# Altium PCB СФ МЭИ ЛБ ПЭ2-18 11.03.04 03.PcbDoc
Units mm, origin at the board's own origin, x right, y up, seen from the top; angles counter-clockwise.
Board outline 36.78 x 15.7 mm, 2 copper layers (Top Layer, Bottom Layer); 15 components, 9 nets, 46 pads, 0 vias.
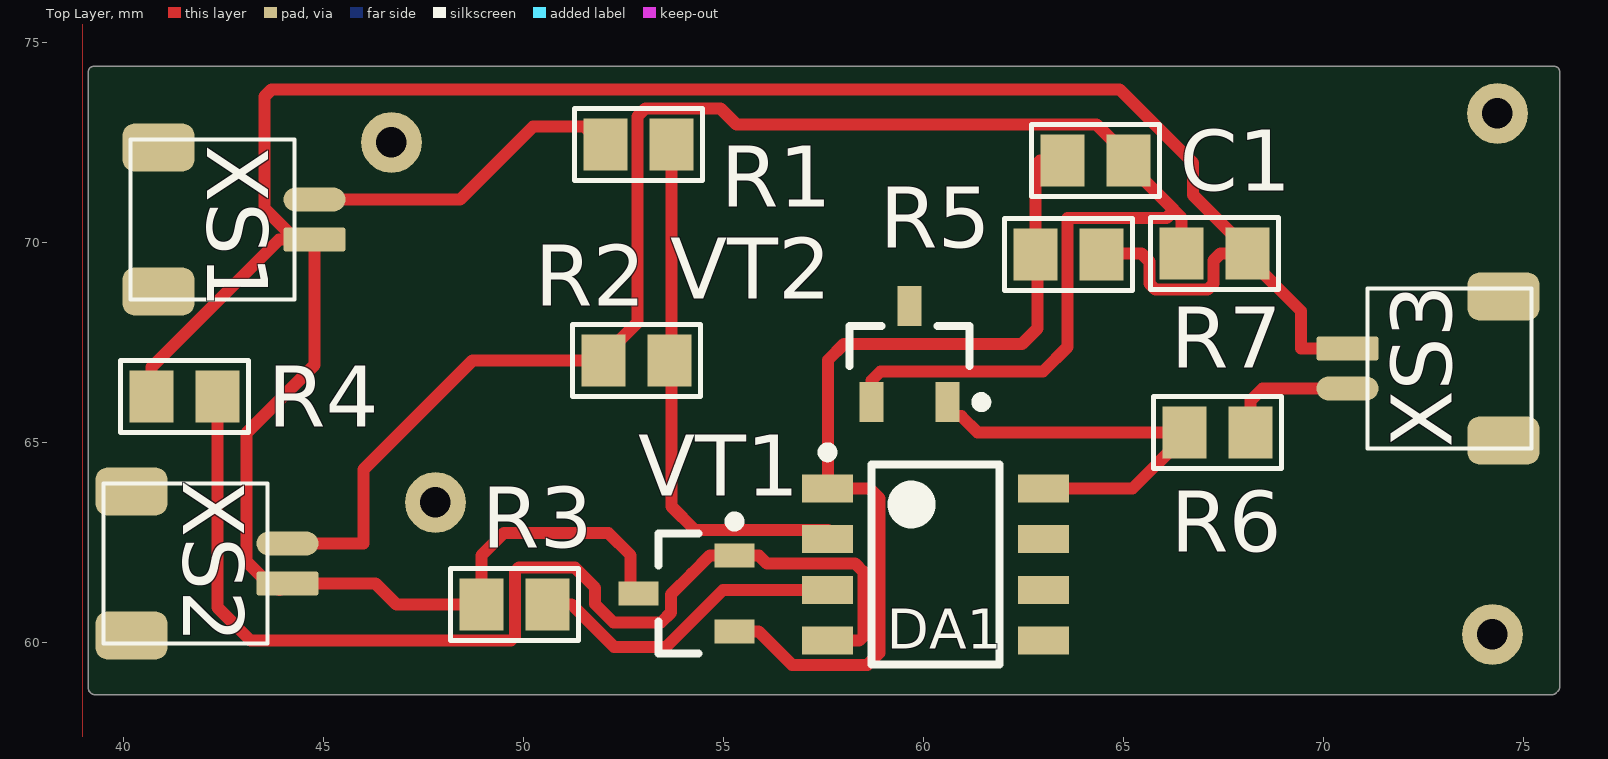
[diagram p0: Top Layer view]
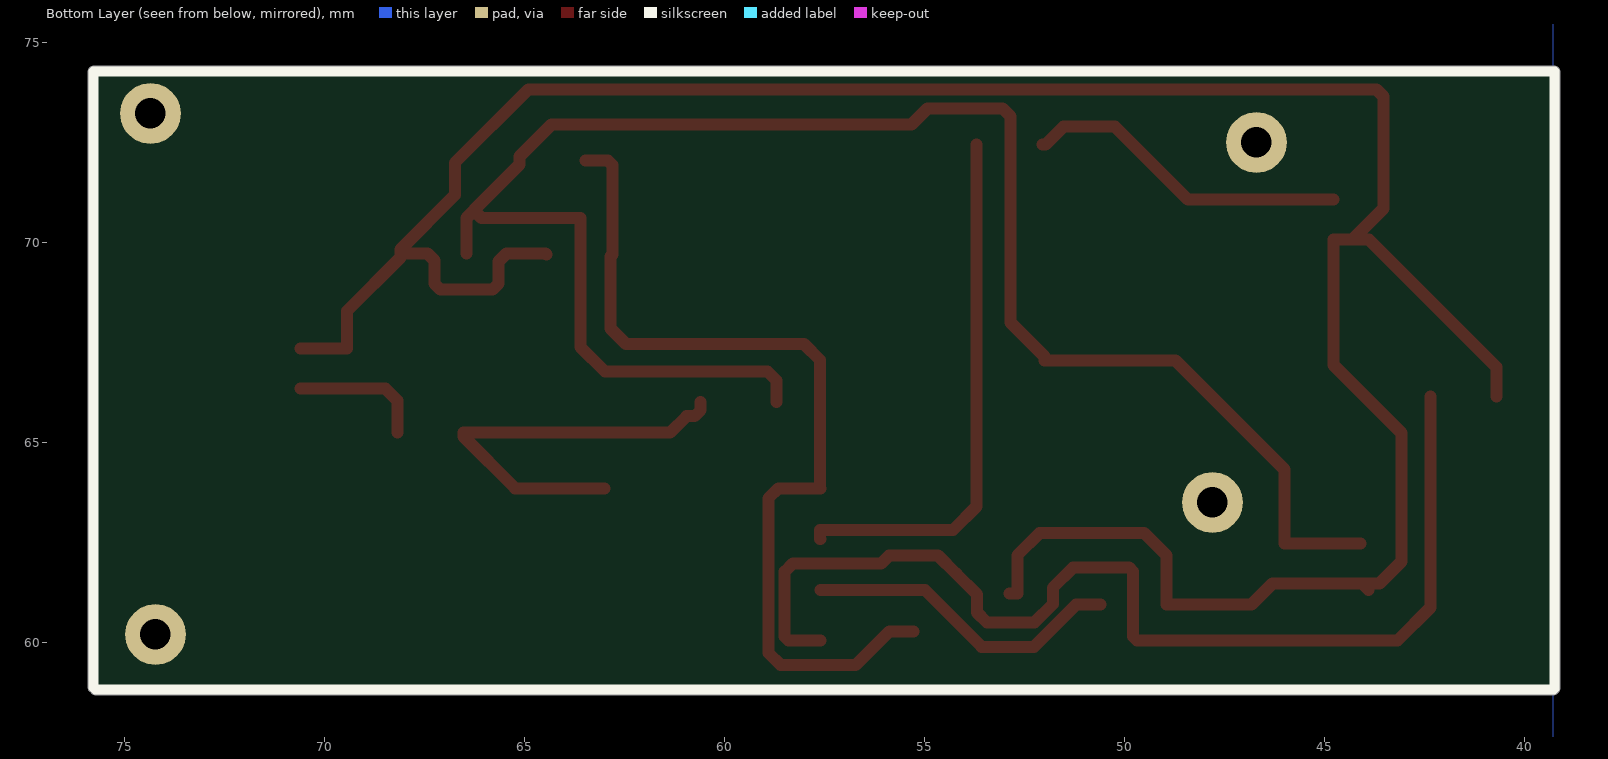
[diagram p1: Bottom Layer view, seen from below]
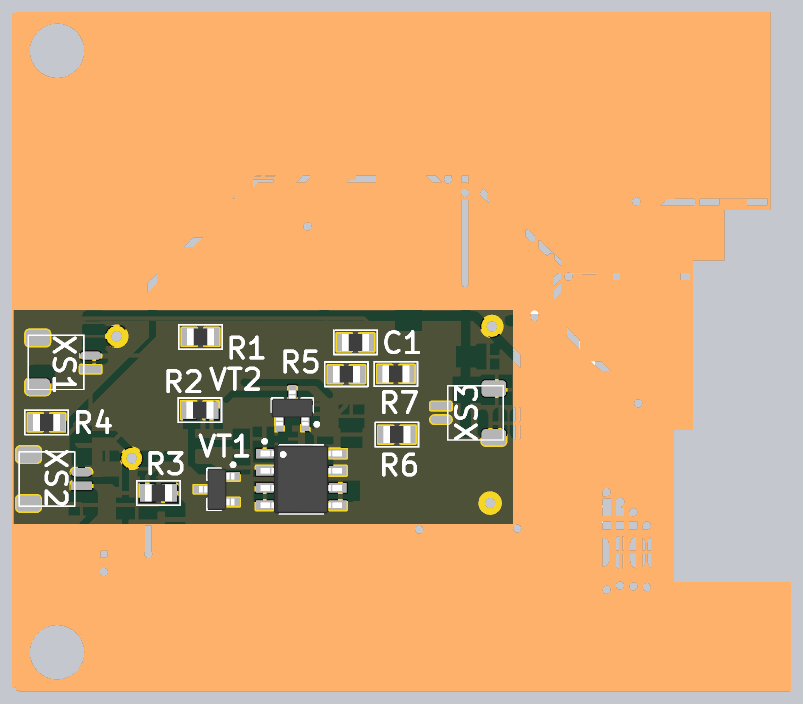
[diagram p2: 3D render of the assembled board from above, using the file's embedded part models]

## Layer stack, top to bottom
Top Solder: solder mask 0.0102, Solder Resist, Dk 3.5
Top Layer: signal copper 0.0356
Dielectric 1: dielectric 0.32, FR-4, Dk 4.8
Bottom Layer: signal copper 0.0356
Bottom Solder: solder mask 0.0102, Solder Resist, Dk 3.5

## Board outline
39.16,58.759 cw(c39.25,58.85) 39.123,58.85 39.123,74.275 cw(c39.25,74.275) 39.25,74.402 75.775,74.402 cw(c75.775,74.275) 75.902,74.275 75.902,58.875 cw(c75.775,58.875) 75.865,58.785 75.815,58.735 cw(c75.725,58.825) 75.725,58.698 39.275,58.698 cw(c39.275,58.825) 39.184,58.735 39.185,58.735

## Design rules (kind name [scope] priority, off if disabled: settings)
Clearance [All] p1: gap=0.1 ignorepadtopadclearanceinfootprint=FALSE except(0: Arc-Hole Track-Hole SMDPad-Hole THPad-Hole Via-Hole Fill-Hole Poly-Hole Region-Hole Text-Hole)
MinimumAnnularRing MinimumAnnularRing_1 [All] p1: minimumring=0.254
MinimumAnnularRing [All] p2: minimumring=0.254
PolygonConnect [All] p1: connectstyle=Relief reliefconductorwidth=0.254 reliefentries=4 polygonreliefangle="90 Angle" airgapwidth=0.254
RoutingVias [All] p1: holewidth=0.1 width=1.27 viastyle="Through Hole" minholewidth=0.2 minwidth=0.4 maxholewidth=0.2 maxwidth=0.4
SolderMaskExpansion [All] p1: expansion=0.102 istentingtop=FALSE
Width [All] p1: maxlimit=1 minlimit=0.1 preferedwidth=0.3
30 further rules are at their usual default settings.

## Classes and differential pairs
component class "СФ МЭИ ЛБ ПЭ2-18 11.03.04 02 Э3": C1 DA1 R1 R2 R3 R4 R5 R6 R7 VT1 VT2 XS1 XS2 XS3

## Components (designator, comment, footprint, x,y, rotation, side; value= is the part's Value field where it differs from the comment)
C1 "0.1u" 0805 64.3,72.05 r0 top
DA1 "OPA2337EA/3K" SOIC-8 60.3,61.95 r0 top
R1 "10k" 0805 52.875,72.45 r0 top
R2 "100к" 0805 52.825,67.05 r180 top
R3 "10k" 0805 49.775,60.95 r0 top
R4 "10k" 0805 41.525,66.15 r180 top
R5 "5.1" 0805 63.625,69.7 r0 top
R6 "10k" 0805 67.35,65.249 r0 top
R7 "1k" 0805 67.275,69.725 r180 top
VT1 "Биполярный транзистор n-p-n" SOT23 54.075,61.225 r180 top
VT2 "Биполярный транзистор p-n-p" SOT23 59.646,67.209 r90 top
XS1 "SM02B" "CI1102M1H  (F)" 42.575,72.575 r270 top
XS2 "SM02B" "CI1102M1H  (F)" 41.9,63.975 r270 top
XS3 "SM02B" "CI1102M1H  (F)" 72.8,64.85 r90 top
ZBOAS240494150 "Comment" "BOASVIEWassembly:Вид спереди для сборочного:4:1:0:101" 61.075,2391.425 r0 top

## Footprints (in the part's own frame and the unit in brackets; to place one, negate y for a bottom-side part, rotate by r counter-clockwise, add the part's x,y. Pads: shape width x height; smd on the part's side, far side on the other; paste and mask are expansions set on the pad)
0805 [mm] "Чип (SMD)"
  rect 1.1x1.3 smd: 1(-0.825,0) 2(0.825,0)
  silkscreen extent -1.6,-0.9 1.6,0.9, body extent -1,-0.63 1,0.63, height 0.5
"BOASVIEWassembly:Вид спереди для сборочного:4:1:0:101" [mm]
"CI1102M1H  (F)" [mm]
  oval 0.6x1.55 smd: 1(1.5,2.2)
  rrect20% 0.6x1.55 smd: 2(2.5,2.2)
  rrect50% 1.2x1.8 smd: 3(0.2,-1.7) 4(3.8,-1.7)
  silkscreen extent 0,-2.4 4,1.7
SOIC-8 [mm] "SOIC, 8-Leads, Body 4,90x3,90mm, Pitch 1,27mm, IPC Medium Density"
  rect 1.28x0.7 smd: 1(-2.7,1.905) 2(-2.7,0.635) 3(-2.7,-0.635) 4(-2.7,-1.905) 5(2.7,-1.905) 6(2.7,-0.635) 7(2.7,0.635) 8(2.7,1.905)
  silkscreen extent -2.82,-2.5 1.6,2.93, body extent -3,-2.5 3,2.5, height 1.75
SOT23 [mm] "SOT23, 3-Leads, Body 2,92x2,45mm, Pitch 0,95mm, IPC Medium Density"
  rect 1x0.6 smd: 1(-1.2,-0.95) 2(-1.2,0.95) 3(1.2,0)
  silkscreen extent -1.33,-1.92 0.7,1.5, body extent -1.3,-1.52 1.3,1.52, height 1.12

## Part data
C1: library part "К53-68\"R\"-25В-0.1 мкФ ±10% 0805_1", "К53-68\"R\"-25В-0.1 мкФ ±10%"
R1 R3 R4 R6: library part "0.125Вт 0805 10 кОм, 5%, Чип резистор (SMD)", "0805-0.125 Вт -10 кОм±5%"
R2: library part "0.125Вт 0805 100к кОм, 5%, Чип резистор (SMD)_1", "0805-0.125 Вт -100 кОм±5%"
R5: library part "0.125Вт 0805 5.1 кОм, 5%, Чип резистор (SMD)", "0805-0.125 Вт -5.1 кОм±5%"
R7: library part "0.125Вт 0805 1 кОм, 5%, Чип резистор (SMD)", "0805-0.125 Вт -1 кОм±5%"
VT1: library part 2N697, "2N697"
VT2: library part 2N2338, "2N2338"

## Free pads (board coordinates)
  round 1.524 hole 0.762: 2(74.225,60.2) 3(74.35,73.225) 4(46.7,72.5) 5(47.8,63.5)

## Nets (pads, with @x,y where several pads share a name; then routed paths per layer and width w, separated by ;. In a path a pad name is that pad's centre, name@x,y a point inside that pad or via, vN(x,y) a via of type N, cw(c..) or ccw(c..) an arc to the next point about the centre after c; other vN are vias at no path point)
NetC1_1: C1.1 DA1.1 R5.1 VT1.2 | length 23
  Top Layer w0.3: VT1.2 55.88,60.275 56.719,59.436 58.598,59.436 58.903,59.741 58.903,63.602 58.649,63.855 DA1.1@57.607,63.855 ; DA1.1 DA1.1@57.607,63.855 ; C1.1 62.917,72.05 62.8,71.933 R5.1 62.85,69.65 62.85,67.85 62.462,67.462 58.014,67.462 57.607,67.056 DA1.1@57.607,63.855
NetC1_2: C1.2 R2.2 R7.2 VT2.2 XS2.1 | length 44.9
  Top Layer w0.3: XS2.1 45.999,62.475 45.999,64.324 48.725,67.05 R2.2 52,67.15 52.85,68 52.85,73.154 53.046,73.35 54.925,73.35 55.325,72.95 64.325,72.95 65.125,72.15 C1.2 65.125,71.95 66.262,70.813 66.262,70.8 ; VT2.2 58.696,66.544 58.928,66.777 62.992,66.777 63.602,67.386 63.602,70.612 66.074,70.612 66.262,70.8 ; R7.2 66.45,70.612 66.262,70.8
NetDA1_2: DA1.2 R1.2 R2.1 | length 13.4
  Top Layer w0.3: R1.2 53.7,70.575 53.7,63.398 54.284,62.814 57.607,62.814 57.607,62.585 DA1.2
NetDA1_3: DA1.3 R3.2 | length 8
  Top Layer w0.3: R3.2 51.206,60.95 52.263,59.893 53.569,59.893 54.99,61.315 DA1.3
NetDA1_4: DA1.4 R4.1 VT1.1 | length 28
  Top Layer w0.3: R4.1 42.35,60.876 43.18,60.046 49.682,60.046 49.784,60.147 49.784,61.773 49.886,61.874 51.283,61.874 51.791,61.366 51.791,60.96 52.248,60.502 53.442,60.502 53.688,60.749 53.688,61.202 54.206,61.72 54.661,62.175 54.834,62.175 VT1.1 55.884,62.175 56.083,61.976 58.293,61.976 58.496,61.773 58.496,60.147 58.394,60.045 DA1.4
NetDA1_8: DA1.8 R6.1 VT2.1 | length 10.5
  Top Layer w0.3: VT2.1 60.596,65.809 60.746,65.659 60.946,65.659 61.356,65.249 R6.1 66.525,65.149 65.231,63.855 DA1.8
NetR1_1: R1.1 XS1.1 | length 8.2
  Top Layer w0.3: XS1.1 46.596,71.075 48.418,71.075 49.793,72.45 50.241,72.898 51.52,72.898 51.968,72.45 R1.1
NetR3_1: R3.1 R4.2 R5.2 R7.1 VT1.3 XS1.2 XS2.2 XS3.2 | length 67.9
  Top Layer w0.3: R4.2 40.7,66.884 43.891,70.075 XS1.2@44.3,70.075 ; XS2.2@43.9,61.316 44.059,61.475 43.625,61.475 43.075,62.025 43.075,65.236 44.775,66.936 XS1.2 XS1.2@44.3,70.075 ; XS2.2 46.3,61.475 46.825,60.95 R3.1 48.95,62.179 49.509,62.738 52.121,62.738 52.68,62.179 52.68,61.225 VT1.3 ; R5.2 64.475,69.725 65.45,69.725 65.65,69.525 65.65,68.971 65.796,68.825 67.104,68.825 67.25,68.971 67.25,69.549 67.426,69.725 R7.1 ; XS3.2 69.442,67.35 69.442,68.283 68.1,69.625 R7.1 ; XS1.2@44.3,70.075 43.525,70.85 43.525,73.649 43.701,73.825 64.904,73.825 66.739,71.989 66.739,71.186 68.1,69.825 R7.1
NetR6_2: R6.2 XS3.1 | length 3.3
  Top Layer w0.3: R6.2 68.175,66.047 68.478,66.35 XS3.1
pads on no net: DA1.5 DA1.6 DA1.7 VT2.3 XS1.3 XS1.4 XS2.3 XS2.4 XS3.3 XS3.4

## Polygon pours and split planes (outlines as drawn)
no net on Bottom Layer "GND A" (solid, shelved, pour order 7): 39.275,46.375 39.275,96.4 142.075,96.4 142.075,46.375
no net on Top Layer "GND A" (solid, shelved, pour order 6): 38.981,46.316 38.981,96.341 141.781,96.341 141.781,46.316
no net on Top Overlay "NONET_L01_P-001" (solid): 39.325,73.95

## Silkscreen, mask and mechanical layers (free items; w line width, h text height)
Bottom Overlay:
  lines w0.254: 39.25,58.85 39.275,58.825 ; 39.25,58.85 39.25,74.275 75.775,74.275 75.775,58.875 75.725,58.825 39.275,58.825 ; 39.25,58.85 39.275,58.825
Mechanical 7:
  text "BOASFORMAT|А3|101|0|883070867|165354330|1000000000|4:1|" at 0,2540 h0
  text "DimPos|62677165|962726378|-6574804|-15009842|3|1537097" at 175.9,2483.45 h0
  text "DimPos|75482283|960088583|-24970473|-17372047|1|908151" at 255.15,2482.75 h0
  text "DimPos|68858268|959045276|-15531496|-17903543|4|1178539" at 214.35,2481.45 h0
  text "DimPos|55206693|955108268|-8051181|-21358267|1|908151" at 160.675,2480.225 h0
  text "DimPos|44763780|963454724|-11181102|-12381890|5|1742827" at 142.1,2478.625 h0
  text "DimPos|26850394|959980315|10098425|-13572835|2|1772217" at 42.55,2472.825 h0
  text "DimPos|45305118|953897638|12706693|-18897638|6|1454805" at 82.8,2470.9 h0
  text "DimPos|26417323|953356299|11407480|-10206693|3|1537097" at 38.125,2447.45 h0
  text "DimPos|25984252|945649606|11515748|-5216536|4|1178539" at 36.75,2415.2 h0
  text "DimPos|79124016|954173228|-12509842|6978346|1|908151" at 232.75,2405.875 h0
  text "DimPos|39980315|945000000|9547244|10423228|7|1416598" at 77.3,2373.825 h0
  text "DimPos|63198819|958651575|-4350394|25669292|1|908151" at 171.575,2369.775 h0
  text "DimPos|69389764|951279528|-9340551|18562993|2|1772217" at 199.975,2369.1 h0
  text "DimPos|49320866|944458661|9448819|12381889|8|1584121" at 101.275,2367.475 h0
  text "DimPos|58877953|945757874|8366142|13789370|9|1454805" at 128.3,2367.2 h0
  text "SET2|Superlayer=MechanicalLayer7|Wsuperlayer=MechanicalLayer8|Layergrid=MechanicalLayer9|Werase=MechanicalLayer11|Layermark=MechanicalLayer12|Layerstamp=MechanicalLayer13|Thinline=0,18|Basicline=0,6|Gridline=0,18|Boardline=0,6|Contourpolygonline=0,6|PcbGridStep=1,25|PcbGridCleareanceAtView=0|PcbGridNumberEach=l4|PcbGridLineEach=l2|PcbGridCountSecondaryStrip=1|PcbGridEnabledStrip=True|PcbSignalGridEnabled=True|PcbSignalShowBukva=True|RealSignalLayerNames=False|PcbGridEnabledBothSide=False|RealLayerNames=False|SilkShowPad=True|SilkViewName=Слой маркировки|SilkShowHole=True|SilkShowAxis=True|SilkShowBukva=True|SilkShowGrid=False|SolderShowGrid=False|SolderViewName=Слой маски|SolderShowAxis=False|SolderShowBukva=False|MainViewShowGrid=False|MainViewUseShapesDrill=False|ShowBukvaOnSboky=True|Density=2,2|TableName=Таблица 1|RazrezWidth=100|Sher=Rz 160|Asstoplayer=TopOverlay|Asstoplayer2=MechanicalLayer15|Assbottomlayer=MechanicalLayer2|Assbottomlayer2=MechanicalLayer15|AssMinDiameterHoles=2|AssDim=False|AssMech=True|AssSilk=False|AssComponentSilk=False|AssFreeSilk=False|AssSmdPads=False|AssGridEnable=False|Mirror=Horisontal|PcbGridFontSize=5|PcbGridCenterZero=False|TTStampDistance=12|MainFontSize=5|PolyStep=2|PcbDrillDrawingGridEnabled=False|PcbDrillDrawingViewName=Слой сверловки|PcbDrillDrawingShowBukva=False|PcbDrillDrawingShowAxis=False|PcbSignalLayersUseDrill=False|PcbSignalLayersUseShapesDrill=False|PcbSignalLayersShowAxis=False" at 0,0.025 h0
  text "2TT0008# 9.Радиатор прикрепить при помощи клей теплопроводный Радиал" at 0,0 h0
  text "2TT0007#  8 Клеймить." at 0,0 h0
  text "2TT0006#  7 Маркировать обозначение и заводской номер печатного узла черной краской МКЭ ОСТ 4ГО.054.2050М2 шрифтом 3,5 или 5 тип А ГОСТ 2.304-81, вместе, удобном для чтения." at 0,0 h0
  text "2TT0005#  6 Покрытие лак УР-231 ТУ6-21-14-90(3). Допускается покрытие лаком ЭП-730 ГОСТ 20824-81(3)." at 0,0 h0
  text "2TT0004#  5 Элементы поверхностного монтажа паять припойной пастой ПОС-61 ЛОК ТУ 400 К''Р''-1805-22-91, флюс ФПС-3 ТУ400 СП \"ЭВ\"-2178-137-98." at 0,0 h0
  text "2TT0003#  4 Меры защиты от статического электричества по ОСТ 92-1615-74. Степень жесткости II по ОСТ11.073.062-2001." at 0,0 h0
  text "2TT0002#  3** Размеры обеспеч. инстр." at 0,0 h0
  text "2TT0001#  2* Размеры для справок." at 0,0 h0
  text "2TT0000#  1 Установку элементов производить по чертежу." at 0,0 h0
  text "TT0005#" at 0,0 h0
  text "TT0004#  5 Конфигурацию печатных проводников выдерживать по координатной сетке с отклонениями от чертежа ±1,5 мм." at 0,0 h0
  text "TT0003#  4 Шаг координатной сетки 1,25 мм. Линии сетки нанесены через одну." at 0,0 h0
  text "TT0002#  3 Печатная плата должна соответствовать ГОСТ Р 53429-2009, группе жесткости 3 при верхнем значении температуры окружающей среды (85±2) °С." at 0,0 h0
  text "TT0001#  2 Класс точности 3 по ГОСТ Р 53429-2009." at 0,0 h0
  text "TT0000#  1 *  Размер для справок." at 0,0 h0
  text "STAMP|Наименование1|Промежуточный" at 0,0 h0
  text "STAMP|Наименование2|Усилитель" at 0,0 h0
  text "STAMP|Обозначение|СФ МЭИ ЛБ ПЭ2-18 11.03.04 02" at 0,0 h0
  text "STAMP|Масса|120 г" at 0,0 h0
  text "STAMP|Разработал|Гончаренко А.Ю." at 0,0 h0
  text "STAMP|Проверил|Смолин В.А." at 0,0 h0
  text "STAMP|Утвердил|Рассказа Д.С." at 0,0 h0
  text "STAMP|Var|Нач. отд." at 0,0 h0
  text "STAMP|Tech|Т.контр." at 0,0 h0
  text "STAMP|Normo|Н.контр." at 0,0 h0
  text "STAMP|Check|Пров." at 0,0 h0
  text "STAMP|Design|Разраб." at 0,0 h0
  text "STAMP|Utv|Утв." at 0,0 h0
  text "STAMP|Первичная применяемость|СФ МЭИ ЛБ ПЭ2-18 11.03.04 02" at 0,0 h0
  text "STAMP|Организация|НИУ СФ МЭИ ПЭ2-18" at 0,0 h0
  text "2STAMP|Организация|НИУ СФ МЭИ ПЭ2-18" at 0,0 h0
  text "2STAMP|Масса|120 г" at 0,0 h0
  text "2STAMP|Первичная применяемость|СФ МЭИ ЛБ ПЭ2-18 11.03.04 02" at 0,0 h0
  text "2STAMP|Наименование1|Промежуточный" at 0,0 h0
  text "2STAMP|ТипДокумента|Сборочный чертёж" at 0,0 h0
  text "2STAMP|Наименование2|усилитель" at 0,0 h0
  text "2STAMP|Разработал|Гончаренко А.Ю." at 0,0 h0
  text "2STAMP|Проверил|Смолин В.А." at 0,0 h0
  text "2STAMP|Утвердил|Рассказа Д.С." at 0,0 h0
  text "2STAMP|Var|Нач. отд." at 0,0 h0
  text "2STAMP|Tech|Т.контр." at 0,0 h0
  text "2STAMP|Normo|Н.контр." at 0,0 h0
  text "2STAMP|Check|Пров." at 0,0 h0
  text "2STAMP|Design|Разраб." at 0,0 h0
  text "2STAMP|Utv|Утв." at 0,0 h0
  text "2STAMP|Обозначение|СФ МЭИ ЛБ ПЭ2-18 11.03.04 02 СБ" at 0,0 h0
  text "BOASVIADRILLTABLE:" at 0,0 h0
  text "2BOASDRILLTABLE:none,300000,Да,4,True," at 0,0 h0
Mechanical 9:
  circle w0.6: c140.225,2425.975 r0.2
  circle w0.6: c160.525,2434.975 r0.2
  circle w0.6: c174.9,2435.975 r0.2
  circle w0.6: c159.2,2445.325 r0.2
  circle w0.6: c176.25,2416.25 r0.2
  circle w0.6: c200.975,2423.6 r0.2
  circle w0.6: c149.55,2402.225 r0.2
  circle w0.6: c125.275,2398.925 r0.2
  circle w0.6: c101.55,2400.3 r0.2
  circle w0.6: c115.075,2422.9 r0.2
  circle w0.6: c113.7,2447.175 r0.2
  circle w0.6: c66,2401.95 r0.2
  circle w0.6: c67.1,2421.525 r0.2
  circle w0.6: c68.2,2438.35 r0.2
  circle w0.6: c191.725,2438.625 r0.2
  lines w0.18: 28.757,2415.2 36.75,2415.2 66,2401.95 ; 29.221,2447.45 38.125,2447.45 67.1,2421.525 ; 33.049,2472.825 42.55,2472.825 68.2,2438.35 ; 68.702,2373.825 77.3,2373.825 101.55,2400.3 ; 74.105,2470.9 82.8,2470.9 115.075,2422.9 ; 92.251,2367.475 101.275,2367.475 125.275,2398.925 ; 113.7,2447.175 142.1,2478.625 151.527,2478.625 ; 119.605,2367.2 128.3,2367.2 149.55,2402.225 ; 140.225,2425.975 160.675,2480.225 167.982,2480.225 ; 159.2,2445.325 175.9,2483.45 184.804,2483.45 ; 160.525,2434.975 171.575,2369.775 178.882,2369.775 ; 174.9,2435.975 214.35,2481.45 222.343,2481.45 ; 176.25,2416.25 199.975,2369.1 209.476,2369.1 ; 191.725,2438.625 255.15,2482.75 262.457,2482.75 ; 200.975,2423.6 232.75,2405.875 240.057,2405.875
  text "3" at 178.4,2485.98 h10.75
  text "1" at 257.65,2485.28 h10.75
  text "4" at 216.85,2483.98 h10.75
  text "9" at 163.175,2482.755 h10.75
  text "7" at 144.6,2481.155 h10.75
  text "2" at 35.549,2475.355 h10.75
  text "8" at 76.605,2473.43 h10.75
  text "7" at 31.721,2449.98 h10.75
  text "2" at 31.257,2417.73 h10.75
  text "2" at 235.25,2408.405 h10.75
  text "7" at 71.202,2376.355 h10.75
  text "6" at 174.075,2372.305 h10.75
  text "7" at 202.475,2371.63 h10.75
  text "10" at 94.751,2370.005 h10.75
  text "4" at 122.105,2369.73 h10.75
Mechanical 13:
  lines w0.18: 230,2253 295,2253 ; 230,2258 295,2258 ; 230,2263 295,2263 ; 230,2268 295,2268 ; 230,2273 295,2273 ; 230,2288 295,2288 ; 230,2293 295,2293 ; 230,2298 295,2298 ; 369.96,2268 369.96,2283 ; 374.98,2268 374.98,2283
  lines w0.6: 8,2273 20,2273 ; 8,2308 20,2308 ; 8,2333 20,2333 ; 8,2358 20,2358 ; 8,2475 20,2475 ; 13,2248 13,2393 ; 13,2415 13,2535 ; 20,2393 8,2393 8,2248 20,2248 ; 20,2415 8,2415 8,2535 20,2535 ; 20,2521 90,2521 90,2535 ; 230,2248 230,2303 415,2303 ; 230,2278 295,2278 ; 230,2283 295,2283 ; 237,2278 237,2303 ; 247,2248 247,2303 ; 270,2248 270,2303 ; 285,2248 285,2303 ; 295,2248 295,2303 415,2303 ; 295,2263 365,2263 415,2263 ; 295,2288 415,2288 ; 365,2248 365,2288 ; 365,2268 415,2268 ; 365,2283 380,2283 415,2283 ; 380,2268 380,2288 ; 385.57,2263 385.57,2268 ; 397,2268 397,2288 ; 415,2311 415,2303 ; 20,2248 415,2248 415,2535 20,2535 ; 20,2248 20,2535
  text "СФ МЭИ ЛБ ПЭ2-18 11.03.04 02 СБ" at 89.51,2530.01 h7.32 r180
  text "Перв. примен." at 11.976,2494.373 h5.38 r90
  text "СФ МЭИ ЛБ ПЭ2-18 11.03.04 02" at 17.976,2482.064 h5.38 r90
  text "Справ. №" at 11.976,2437.78 h5.38 r90
  text "Подп. и дата" at 11.976,2365.961 h5.38 r90
  text "Инв. № дубл." at 11.976,2336.457 h5.38 r90
  text "1 Установку элементов производить по чертежу. /   2* Размеры для справок. /   3** Размеры обеспеч. инстр. /   4 Меры защиты от статического электричества по ОСТ 92-1615-74. Степень жесткости II по ОСТ11.073.062-2001. /   5 Элементы поверхностного монтажа паять припойной пастой ПОС-61 ЛОК ТУ 400 К''Р''-1805-22-91, флюс ФПС-3 ТУ400 СП \"ЭВ\"-2178-137-98.  /   6 Покрытие лак УР-231 ТУ6-21-14-90(3). Допускается покрытие лаком ЭП-730 ГОСТ 20824-81(3)." at 235,2323 h7.68
  text "Взам. инв. №" at 11.976,2311.496 h5.38 r90
  text "СФ МЭИ ЛБ ПЭ2-18 11.03.04 02 СБ" at 318.799,2293.391 h7.68
  text "Лит." at 369.328,2284.024 h5.38
  text "Масса" at 384.108,2284.024 h5.38
  text "Масштаб" at 399.133,2284.024 h5.38
  text "Подп. и дата" at 11.976,2282.461 h5.38 r90
  text "Промежуточный" at 312.95,2280.891 h7.68
  text "Изм." at 230.687,2279.024 h5.38
  text "Лист" at 238.024,2279.024 h5.38
  text "№ докум." at 252.271,2279.024 h5.38
  text "Подп." at 273.92,2279.024 h5.38
  text "Дата" at 285.963,2279.024 h5.38
  text "Разраб." at 230.533,2273.771 h5.38
  text "Гончаренко А.Ю." at 247.68,2273.771 h5.09
  text "120 г" at 383.233,2273.391 h7.68
  text "4:1" at 403.065,2273.391 h7.68
  text "усилитель" at 318.641,2272.891 h7.68
  text "Пров." at 230.533,2268.771 h5.38
  text "Смолин В.А." at 247.68,2268.771 h5.38
  text "Сборочный чертёж" at 316.094,2265.524 h5.38
  text "Т.контр." at 230.533,2263.771 h5.38
  text "Лист" at 366.442,2263.771 h5.38
  text "Листов" at 387.485,2263.771 h5.38
  text "1" at 407.424,2263.771 h5.38
  text "Нач. отд." at 230.533,2258.771 h5.38
  text "7 Маркировать обозначение и заводской номер печатного узла черной краской МКЭ ОСТ 4ГО.054.2050М2 шрифтом 3,5 или 5 тип А ГОСТ 2.304-81, вместе, удобном для чтения. /   8 Клеймить. /  9.Радиатор прикрепить при помощи клей теплопроводный Радиал" at 25,2255 h7.68
  text "Н.контр." at 230.533,2253.771 h5.38
  text "НИУ СФ МЭИ ПЭ2-18" at 368.285,2253.391 h7.68
  text "Инв. № подл." at 11.976,2251.457 h5.38 r90
  text "Утв." at 230.533,2248.771 h5.38
  text "Рассказа Д.С." at 247.68,2248.771 h5.38
  text "Копировал" at 305.533,2243.771 h5.38
  text "Формат А3" at 386.625,2243.771 h5.38

## Dimensions
75.725,58.825 to 75.775,74.275 on Bottom Overlay
39.275,58.825 to 75.725,58.825 on Bottom Overlay

## Text inside footprints (layer, text, board x,y; h text height)
ZBOAS240494150: Mechanical 12 "VT2" at 119.259,2430.988 h6.1; Mechanical 12 "R7" at 169.306,2424.088 h6.1; Mechanical 12 "R3" at 100.406,2406.088 h6.1; Mechanical 12 "XS2" at 70.538,2412.86 h6.1 r270; Mechanical 12 "R6" at 169.306,2405.688 h6.1; Mechanical 12 "XS3" at 197.432,2416.109 h6.1 r90; Mechanical 12 "R4" at 79.006,2418.188 h6.1; Mechanical 12 "C1" at 170.222,2441.788 h6.1; Mechanical 12 "R5" at 140.206,2436.088 h6.1; Mechanical 12 "DA1" at 140.919,2396.015 h4; Mechanical 12 "R1" at 124.322,2440.188 h6.1; Mechanical 12 "R2" at 105.706,2430.288 h6.1; Mechanical 12 "VT1" at 116.075,2411.288 h6.1; Mechanical 12 "XS1" at 72.938,2446.344 h6.1 r270